# EAGLE board Incredible Luulia-Bombul (EAGLE 7.6.0)

Size 73.58 x 63.39 mm. Coordinates in mm from the lower left corner, seen from the top.
Outline: 0,0 56.82,0 56.82,53.33 0,53.33 0,0
Copper layers (1*16): Top 0.035mm / dielectric 1.5mm / Bottom 0.035mm
Design rules "default": minimum track width 10mil, minimum drill 24mil, track to track 8mil, track to pad 8mil, pad to pad 8mil, via to via 8mil, smd to smd 8mil, copper to edge 40mil, drill to drill 8mil, minimum pad ring 10mil, minimum via ring 8mil, stop-mask expansion 4mil, vias tented up to drill 0mil, thermal gap 10mil

## Footprints (pad centres in the part's own frame; a part is rotated, then mirrored left to right if it is on the bottom)
LED-RGB-THRU = drill 0.762 pad 0.889 long: 1 1.905,0; 2 0.635,0; 3 -0.635,0; 4 -1.905,0
0207/10 = drill 0.813 octagon: 1 -5.08,0; 2 5.08,0
B25V = drill 0.813 long: A 2.54,0.635; E -2.54,0.635; S 0,0.635
1X16P-2.54-2.54-11.6-3.0-BLACK-MALE = drill 0.889 pad 1.651 square: 1 0,19.05 | drill 0.889 pad 1.651: 2 0,16.51; 3 0,13.97; 4 0,11.43; 5 0,8.89; 6 0,6.35; 7 0,3.81; 8 0,1.27; 9 0,-1.27; 10 0,-3.81; 11 0,-6.35; 12 0,-8.89; 13 0,-11.43; 14 0,-13.97; 15 0,-16.51; 16 0,-19.05
ARDUINO_UNO = drill 1.016 pad 1.88: 0 63.5,50.8; 1 60.96,50.8; 2 58.42,50.8; 3 55.88,50.8; 3.3V 35.56,2.54; 4 53.34,50.8; 5 50.8,50.8; 5V 38.1,2.54; 6 48.26,50.8; 7 45.72,50.8; 8 41.656,50.8; 9 39.116,50.8; 10 36.576,50.8; 11 34.036,50.8; 12 31.496,50.8; 13 28.956,50.8; A0 50.8,2.54; A1 53.34,2.54; A2 55.88,2.54; A3 58.42,2.54; A4 60.96,2.54; A5 63.5,2.54; AREF 23.876,50.8; GND 26.416,50.8; GND. 43.18,2.54; GND.. 40.64,2.54; I/OREF 30.48,2.54; N/C 27.94,2.54; RESET 33.02,2.54; SCL 18.796,50.8; SDA 21.336,50.8; VIN 45.72,2.54 | hole 3.2: 66.04,7.62; 66.04,35.56; 15.24,50.8; 13.97,2.54

## Placement (x,y rotation side)
D1  [LED-RGB-THRU]  5,60.88 0 top
D2  [LED-RGB-THRU]  5,86.28 0 top  (outside the outline)
D3  [LED-RGB-THRU]  5,98.98 0 top  (outside the outline)
D4  [LED-RGB-THRU]  5,111.68 0 top  (outside the outline)
D5  [LED-RGB-THRU]  5,124.38 0 top  (outside the outline)
D6  [LED-RGB-THRU]  5,137.08 0 top  (outside the outline)
D7  [LED-RGB-THRU]  5,149.78 0 top  (outside the outline)
D8  [LED-RGB-THRU]  5,238.68 0 top  (outside the outline)
D9  [LED-RGB-THRU]  5,264.08 0 top  (outside the outline)
D10  [LED-RGB-THRU]  5,276.78 0 top  (outside the outline)
D11  [LED-RGB-THRU]  5,289.48 0 top  (outside the outline)
D12  [LED-RGB-THRU]  5,302.18 0 top  (outside the outline)
D13  [LED-RGB-THRU]  5,314.88 0 top  (outside the outline)
D14  [LED-RGB-THRU]  5,327.58 0 top  (outside the outline)
R1  1k‎Ω  [0207/10]  5,162.48 0 top  (outside the outline)
R1  1k‎Ω  [0207/10]  5,162.48 0 top  (outside the outline)
R2  10k‎Ω  [0207/10]  5,35.48 0 top
R3  1k‎Ω  [0207/10]  5,175.18 0 top  (outside the outline)
R4  1k‎Ω  [0207/10]  5,187.88 0 top  (outside the outline)
R5  1k‎Ω  [0207/10]  5,200.58 0 top  (outside the outline)
R6  1k‎Ω  [0207/10]  5,213.28 0 top  (outside the outline)
R7  1k‎Ω  [0207/10]  5,225.98 0 top  (outside the outline)
R8  1k‎Ω  [0207/10]  5,251.38 0 top  (outside the outline)
R9  1k‎Ω  [0207/10]  5,340.28 0 top  (outside the outline)
R10  1k‎Ω  [0207/10]  5,352.98 0 top  (outside the outline)
R11  1k‎Ω  [0207/10]  5,365.68 0 top  (outside the outline)
R12  1k‎Ω  [0207/10]  5,378.38 0 top  (outside the outline)
R13  1k‎Ω  [0207/10]  5,391.08 0 top  (outside the outline)
R14  1k‎Ω  [0207/10]  5,403.78 0 top  (outside the outline)
Rpot1  250k‎Ω  [B25V]  5,48.18 0 top
U1  [1X16P-2.54-2.54-11.6-3.0-BLACK-MALE]  5,22.78 0 top
U5  [ARDUINO_UNO]  5,10.08 0 top

## Library data of the parts
D1-D14 R1 R1-R14 Rpot1 U1 U5 = AUTODESK_CIRCUITS_BREADBOARD

## Nets
N$1: R2.2 Rpot1.A U1.2 U5.5V
N$2: R2.1 U1.15
N$3: R1.1 R3.1 R4.1 R5.1 R6.1 R7.1 R8.2 R9.2 R10.2 R11.2 R12.2 R13.2 R14.2 Rpot1.E U1.1 U1.5 U1.16 U5.GND.
N$4: Rpot1.S U1.3
N$5: U1.4 U5.12
N$6: U1.6 U5.11
N$7: U1.11 U5.5
N$8: U1.12 U5.4
N$9: U1.13 U5.3
N$10: U1.14 U5.2
N$11: D1.1
N$12: D4.1
N$13: D4.2 R4.2
N$14: D5.1
N$15: D5.2 R5.2
N$16: D6.1
N$17: D6.2 R6.2
N$18: D7.1
N$19: D7.2 R7.2
N$20: D3.1
N$21: D3.2 R3.2
N$22: D2.1
N$23: D2.2 R1.2
N$24: D1.2 R1.2
N$25: D1.3 D1.4 D2.3 D2.4 D3.3 D3.4 D4.3 D4.4 D5.3 D5.4 D6.3 D6.4 D7.3 D7.4 D8.1 D8.3 D9.1 D9.3 D10.1 D10.3 D11.1 D11.3 D12.1 D12.3 D13.1 D13.3 D14.1 D14.3 U5.13
N$26: D8.2 R8.1
N$27: D8.4
N$28: D9.4
N$29: D9.2 R9.1
N$30: D10.4
N$31: D10.2 R10.1
N$32: D11.4
N$33: D11.2 R11.1
N$34: D12.4
N$35: D12.2 R12.1
N$36: D13.4
N$37: D13.2 R13.1
N$38: D14.4
N$39: D14.2 R14.1

## Tracks (layer width: path | path; a pad name or v marks a point on that pad's centre or on a via)
N$1  (3 unrouted)
N$2  (1 unrouted)
N$3  (18 unrouted)
N$4  (1 unrouted)
N$5  (1 unrouted)
N$6  (1 unrouted)
N$7  (1 unrouted)
N$8  (1 unrouted)
N$9  (1 unrouted)
N$10  (1 unrouted)
N$13  (1 unrouted)
N$15  (1 unrouted)
N$17  (1 unrouted)
N$19  (1 unrouted)
N$21  (1 unrouted)
N$23  (1 unrouted)
N$24  (1 unrouted)
N$25  (28 unrouted)
N$26  (1 unrouted)
N$29  (1 unrouted)
N$31  (1 unrouted)
N$33  (1 unrouted)
N$35  (1 unrouted)
N$37  (1 unrouted)
N$39  (1 unrouted)